# Altium PCB 智能车驱动板DRV8701E元件PCB.PcbDoc
Units mil, origin at the board's own origin, x right, y up, seen from the top; angles counter-clockwise.
Board outline 3320.29 x 1280 mil, 2 copper layers (Top Layer, Bottom Layer); 45 components, 38 nets, 213 pads, 36 vias.
Unrouted connection lines stored in the file: 33.
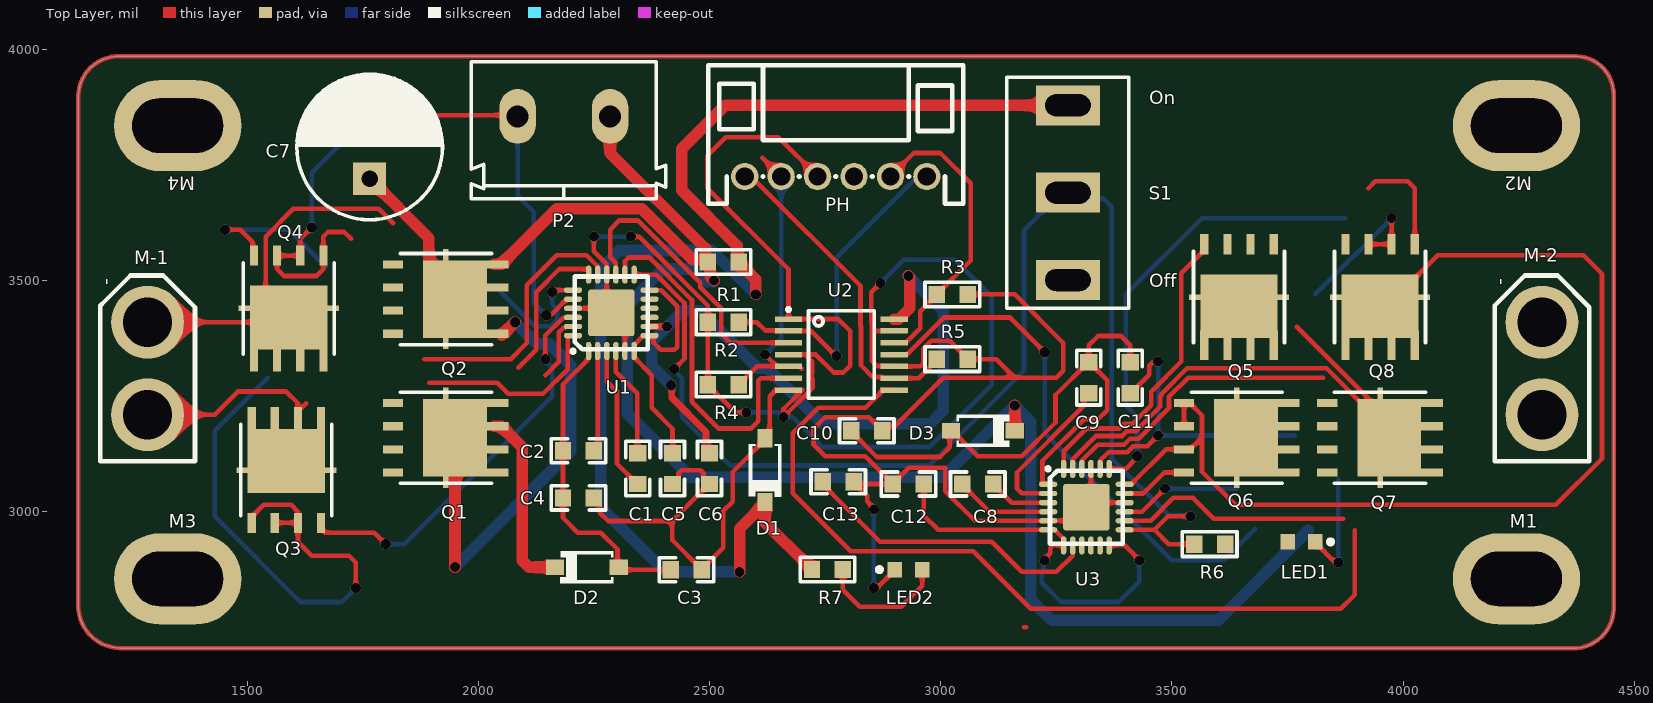
[diagram p0: Top Layer view]
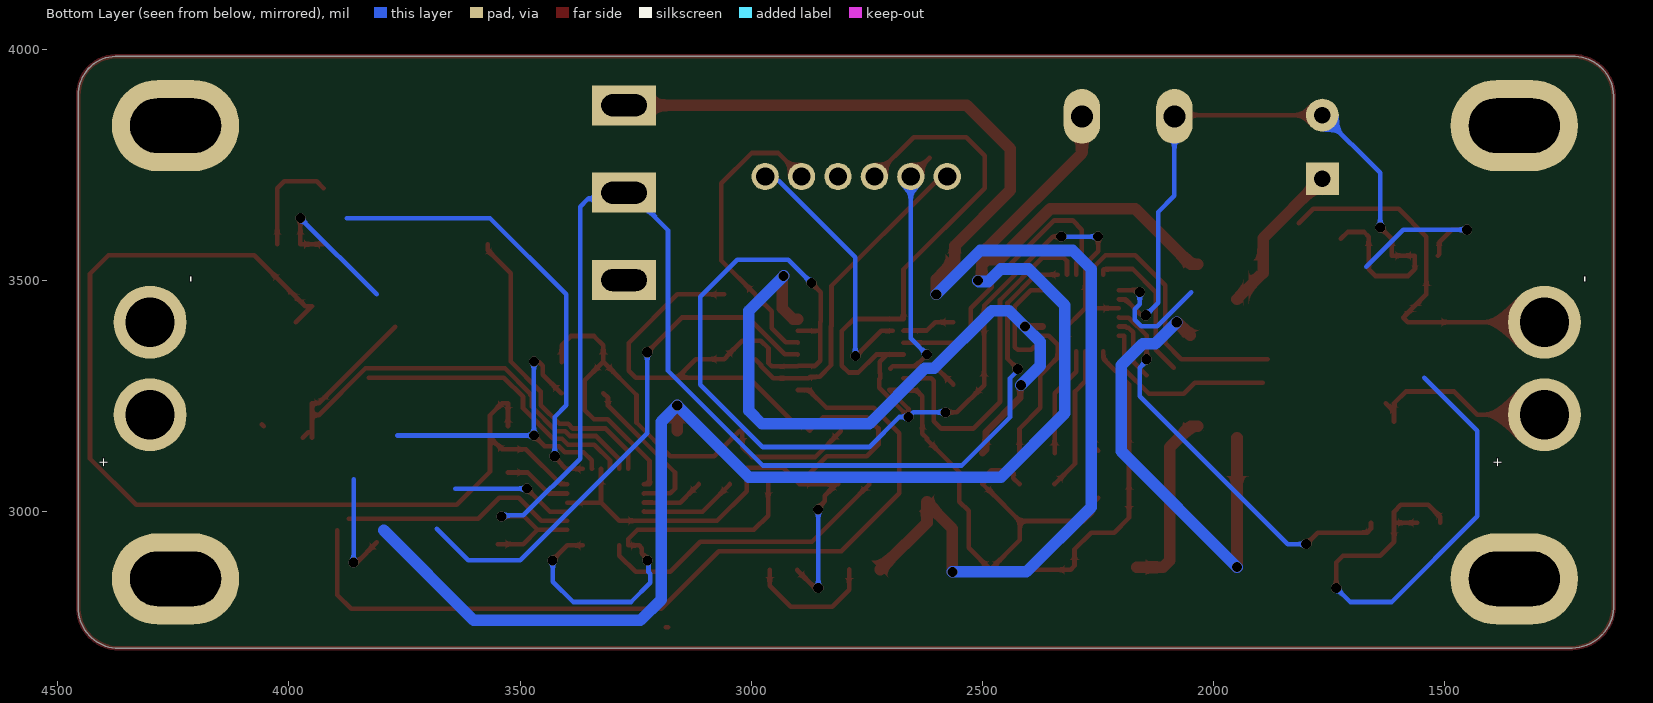
[diagram p1: Bottom Layer view, seen from below]
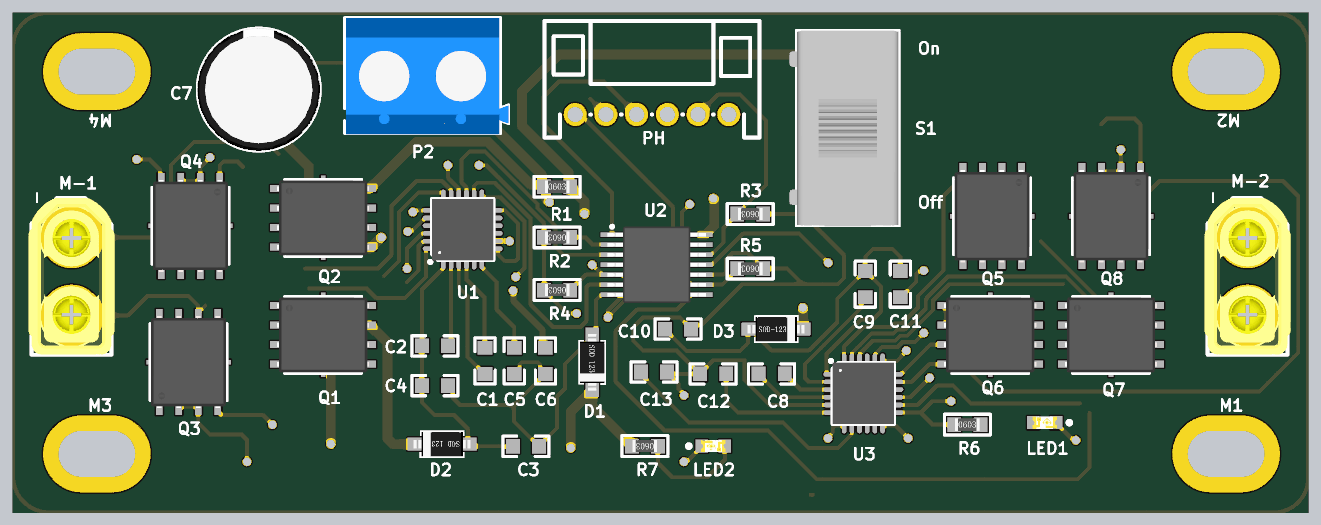
[diagram p2: 3D render of the assembled board from above, using the file's embedded part models]

## Layer stack, top to bottom
Top Solder: solder mask 0.4, Solder Resist, Dk 3.5
Top Layer: signal copper 1.4
Dielectric 1: dielectric 12.6, FR-4, Dk 4.8
Bottom Layer: signal copper 1.4
Bottom Solder: solder mask 0.4, Solder Resist, Dk 3.5

## Board outline
1225,2705 cw(c1227.5,2797.5) 1135,2800 1135,3900 cw(c1222.5,3897.5) 1225,3985 4375,3985 cw(c4372.5,3902.5) 4455,3900 4455,2800 cw(c4367.5,2792.5) 4375,2705

## Design rules (kind name [scope] priority, off if disabled: settings)
BoardOutlineClearance [All] p1: gap=10 ignorepadtopadclearanceinfootprint=FALSE except(0: Arc-SplitContinuation Track-SplitContinuation SMDPad-SplitContinuation THPad-SplitContinuation Via-SplitContinuation Fill-SplitContinuation Poly-SplitContinuation Region-SplitContinuation Text-SplitContinuation; 30: Poly-OutlineEdge Poly-CavityEdge Poly-CutoutEdge Poly-SplitBarrior)
Clearance [All] p1: gap=6 ignorepadtopadclearanceinfootprint=FALSE except(10: Arc-Fill Arc-Poly Arc-Region Track-Fill Track-Poly Track-Region SMDPad-Fill SMDPad-Poly SMDPad-Region THPad-Fill THPad-Poly THPad-Region Fill-Fill Fill-Poly Fill-Region Poly-Poly Poly-Region Region-Region)
PolygonConnect [All] p1: connectstyle=Relief reliefconductorwidth=10 reliefentries=4 polygonreliefangle="90 Angle" airgapwidth=10
RoutingVias [All] p1: holewidth=12 width=22 viastyle="Through Hole" minholewidth=12 minwidth=22 maxholewidth=12 maxwidth=22
SolderMaskExpansion [All] p1: expansion=4 istentingtop=FALSE
Width GND [All] p1: maxlimit=50 minlimit=10 preferedwidth=10
Width PWN [InNetClass('PWN')] p2: maxlimit=50 minlimit=15 preferedwidth=25
Width [All] p3: maxlimit=10 minlimit=6 preferedwidth=10
30 further rules are at their usual default settings.

## Classes and differential pairs
net class POWER: 3V3 DVDD GND VM
net class PWN: 3V3 DVDD VM

## Components (designator, comment, footprint, x,y, rotation, side; value= is the part's Value field where it differs from the comment)
C1 "100nF ±10% 50V" CAPC1608[0603]S-N 2345,3093.46 r270 top value=100nF
C2 "100nF ±10% 50V" CAPC1608[0603]S-N 2216.57,3131.79 r180 top value=100nF
C3 "100nF ±10% 50V" CAPC1608[0603]S-N 2450,2874.5 r0 top value=100nF
C4 "100nF ±10% 50V" CAPC1608[0603]S-N 2216.57,3030 r0 top value=100nF
C5 "100nF ±10% 50V" CAPC1608[0603]S-N 2420,3093.46 r90 top value=100nF
C6 "100nF ±10% 50V" CAPC1608[0603]S-N 2500,3093.46 r90 top value=100nF
C7 "220uF 25V" CAPPR3.5-8X11.5 1765,3788.9 r90 top value=220uF
C8 "100nF ±10% 50V" CAPC1608[0603]S-N 3080,3060 r0 top value=100nF
C9 "100nF ±10% 50V" CAPC1608[0603]S-N 3320,3290 r90 top value=100nF
C10 "100nF ±10% 50V" CAPC1608[0603]S-N 2840,3175 r0 top value=100nF
C11 "100nF ±10% 50V" CAPC1608[0603]S-N 3410,3290 r270 top value=100nF
C12 "100nF ±10% 50V" CAPC1608[0603]S-N 2930,3060 r0 top value=100nF
C13 "100nF ±10% 50V" CAPC1608[0603]S-N 2778.46,3065 r180 top value=100nF
D1 "BZT52C3V3" SOD-123-L 2620,3090 r270 top
D2 "1N5819" SOD-123-L 2235,2880 r180 top
D3 "1N5819" SOD-123-L 3091.1,3175 r0 top
LED1 "Blue" LEDC1608(0603) 3780,2935 r180 top
LED2 "" LEDC1608(0603) 2930.47,2875 r0 top
M1 "MountHole" M3-MountSlot#1 4227.83,2832.2 r0 top
M2 "MountHole" M3-MountSlot#1 4227.83,3812.2 r0 top
M3 "MountHole" M3-MountSlot#1 1332.83,2832.2 r0 top
M4 "MountHole" M3-MountSlot#2 1332.83,3812.2 r0 top
M-1 "xt30-M1" XT30-M 1285,3310 r90 top
M-2 "xt30-M2" XT30-M 4300,3310 r90 top
P2 "KF/WJ/DG 30x connecter" "KF/WJ/DG 301-2p-5.0mm" 2185,3855 r180 top
PH "PH  X6" "PH  X6" 2773.11,3725 r0 top
Q1 "TPH1R403NL" DFN5x6 1930,3160 r270 top
Q2 "TPH1R403NL" DFN5x6 1930,3460 r270 top
Q3 "TPH1R403NL" DFN5x6 1585,3090.31 r0 top
Q4 "TPH1R403NL" DFN5x6 1590,3439.69 r180 top
Q5 "TPH1R403NL" DFN5x6 3645,3464.33 r180 top
Q6 "TPH1R403NL" DFN5x6 3640.31,3160 r270 top
Q7 "TPH1R403NL" DFN5x6 3950,3160 r270 top
Q8 "TPH1R403NL" DFN5x6 3950,3464.33 r180 top
R1 "2.2K ±1%" RESC1608[0603]S-N 2530,3540 r0 top value=2.2K
R2 "10K ±1%" RESC1608[0603]S-N 2530,3410 r180 top value=10K
R3 "10K ±1%" RESC1608[0603]S-N 3025,3470 r180 top value=10K
R4 "10K ±1%" RESC1608[0603]S-N 2530,3275 r180 top value=10K
R5 "10K ±1%" RESC1608[0603]S-N 3025,3330 r180 top value=10K
R6 "330R ±1%" RESC1608[0603]S-N 3581.54,2930 r0 top value=330R
R7 "1K ±1%" RESC1608[0603]S-N 2755,2875.08 r180 top value=1K
S1 "SW-SPDT" SS12D10 3275,3690 r90 top
U1 "DRV8701E" QFN24-4x4 2287.68,3430.16 r90 top
U2 "SN74HC125PWR" TSSOP-14 2785,3340 r0 top
U3 "DRV8701E" QFN24-4x4 3315,3010 r0 top

## Footprints (in the part's own frame and the unit in brackets; to place one, negate y for a bottom-side part, rotate by r counter-clockwise, add the part's x,y. Pads: shape width x height; smd on the part's side, far side on the other; paste and mask are expansions set on the pad)
CAPC1608[0603]S-N [mm]
  rect 0.9x0.95 smd: 1(-0.85,0) 2(0.85,0)
  silkscreen extent -1.5,-0.66 1.5,0.66, body extent -0.8,-0.41 0.8,0.41, height 0.79
CAPPR3.5-8X11.5 [mm]
  rect 1.8x1.8 hole 0.9: 1(-1.75,0)
  round 1.8 hole 0.9: 2(1.75,0)
  silkscreen extent -4,-4.01 4,4, body extent -4,-3.98 4,3.98, height 11.5
DFN5x6 [mm]
  rect 0.45x1.6 smd: 1(-1.905,2.65) 1(-0.635,2.65) 1(0.635,2.65) 1(1.905,2.65)
  rect 5.5x0.3 smd: 1(0,0)
  rect 4.25x3.5 smd: 1(0,0.5)
  rect 0.45x1.1 smd: 2(1.905,-2.9) 3(-1.905,-2.9) 3(-0.635,-2.9) 3(0.635,-2.9)
  silkscreen extent -2.5,-2.5 2.5,2.5, body extent -2.45,-3 2.45,3, height 1
"KF/WJ/DG 301-2p-5.0mm" [mm]
  oval 2x3 hole 1.2: 1(2.54,0) 2(-2.54,0)
  silkscreen extent -5.6,-3 5.08,4.52, body extent -5.6,-3 5,4.6, height 10
LEDC1608(0603) [mm]
  rect 0.8x0.85 smd: A(0.75,0) C(-0.75,0)
  silkscreen extent -1.73,-0.12 -1.48,0.12, body extent -0.8,-0.4 0.8,0.4, height 0.64
M3-MountSlot#1 [mm]
  oval 7x5 hole 3 slot 5 at 0 deg: 1(0.436,0.579)
M3-MountSlot#2 [mm]
  oval 7x5 hole 3 slot 5 at 0 deg: ""(0.436,0.579)
"PH  X6" [mm]
  round 1.5 hole 1: 1(5,0) 2(3,0) 3(1,0) 4(-1,0) 5(-3,0) 6(-5,0)
  silkscreen extent -7,-1.5 7,6.1
QFN24-4x4 [mm]
  rrect10% 2.55x2.55 smd: 0(0,0)
  oval 1x0.3 smd: 1(-2.1,1.25) 2(-2.1,0.75) 3(-2.1,0.25) 4(-2.1,-0.25) 5(-2.1,-0.75) 6(-2.1,-1.25) 13(2.1,-1.25) 14(2.1,-0.75) 15(2.1,-0.25) 16(2.1,0.25) 17(2.1,0.75) 18(2.1,1.25)
  oval 0.3x1 smd: 7(-1.25,-2.1) 8(-0.75,-2.1) 9(-0.25,-2.1) 10(0.25,-2.1) 11(0.75,-2.1) 12(1.25,-2.1) 19(1.25,2.1) 20(0.75,2.1) 21(0.25,2.1) 22(-0.25,2.1) 23(-0.75,2.1) 24(-1.25,2.1)
  silkscreen extent -2.21,-2 2,2.21, body extent -2,-2 2,2, height 0.9
RESC1608[0603]S-N [mm]
  rect 0.9x0.95 smd: 1(-0.85,0) 2(0.85,0)
  silkscreen extent -1.5,-0.67 1.5,0.67, body extent -0.8,-0.4 0.8,0.4, height 0.45
SOD-123-L [mm]
  rect 1x0.85 smd: A(-1.75,0) K(1.75,0)
  silkscreen extent -1.45,-0.9 1.47,0.9, body extent -1.85,-0.8 1.85,0.8, height 1.2
SS12D10 [mm]
  rect 2.2x3.5 hole 1.2 slot 2.5 at 90 deg mask+0.07: 1(-4.8,0) 2(0,0) 3(4.8,0)
  silkscreen extent -6.35,-3.35 6.35,3.35, body extent -6.4,-3.3 6.35,3.8, height 12.5
TSSOP-14 [mm]
  rect 1.5x0.3 smd mask+0.07: 1(-2.9,1.95) 2(-2.9,1.3) 3(-2.9,0.65) 4(-2.9,0) 5(-2.9,-0.65) 6(-2.9,-1.3) 7(-2.9,-1.95) 8(2.9,-1.95) 9(2.9,-1.3) 10(2.9,-0.65) 11(2.9,0) 12(2.9,0.65) 13(2.9,1.3) 14(2.9,1.95)
  silkscreen extent -2.99,-2.4 1.8,2.57, body extent -3.2,-2.5 3.2,2.5, height 1.13
XT30-M [mm]
  round 4 hole 2.7: 1(-2.54,0) 2(2.54,0)
  silkscreen extent -5.1,-2.6 5.11,2.6, body extent -5.1,-2.8 5.1,2.8, height 10.66

## Part data
C1 C2 C3 C4 C5 C6 C8 C9 C10 C11 C12 C13: library part Cap-Chip_1, "贴片电容", Tolerance=±10%, Voltage=50V, Price(RMB)=0.000, Published=8-Jun-2000, Publisher="Altium Limited", Revision="July-2002: Re-released for DXP Platform."
C7: library part Cap-Elect, "Polarized Capacitor (Radial)", Voltage=25V, Price(RMB)=0.000, Published=8-Jun-2000, Publisher="Altium Limited", Revision="July-2002: Re-released for DXP Platform."
D1: library part "Diode Zen", "3.3V稳压二极管 SOD-123", Price(RMB)=0.000, Published=8-Jun-2000, Publisher="Altium Limited", Revision="July-2002: Re-released for DXP Platform."
D2 D3: library part "Diode Schottky", "肖特基二极管 Diode", Imax=500mA, PartNumber=1N5819, Price(RMB)=0.000, Published=8-Jun-2000, Publisher="Altium Limited", Revision="July-2002: Re-released for DXP Platform."
LED1: library part "LED Chip Blue", "Typical Chip LED", Color=Blue, Price(RMB)=0.00, Published=8-Jun-2000, Publisher="Altium Limited", Revision="July-2002: Re-released for DXP Platform."
LED2: library part "LED Chip Red", "Typical Chip LED", Price(RMB)=0.00, Published=8-Jun-2000, Publisher="Altium Limited", Revision="July-2002: Re-released for DXP Platform."
M1 M2 M3 M4: "固定孔"
M-1 M-2: library part xt30-M, "电机驱动"
P2: library part "KF/WJ/DG 30x", "接线端子 2Pin"
PH: "6脚PH"
Q1 Q2 Q3 Q4 Q5 Q6 Q7 Q8: "东芝 N沟 MOS"
R1: library part Res-Chip, "贴片电阻", Tolerance=±1%, Price(RMB)=0.000, Published=8-Jun-2000, Publisher="Altium Limited", Revision="July-2002: Re-released for DXP Platform."
R2 R3 R4 R5: library part Res-Chip_1, "贴片电阻", Tolerance=±1%, Price(RMB)=0.000, Published=8-Jun-2000, Publisher="Altium Limited", Revision="July-2002: Re-released for DXP Platform."
R6: library part Res-Chip_3, "贴片电阻", Tolerance=±1%, Price(RMB)=0.000, Published=8-Jun-2000, Publisher="Altium Limited", Revision="July-2002: Re-released for DXP Platform."
R7: library part Res-Chip_2, "贴片电阻", Tolerance=±1%, Price(RMB)=0.000, Published=8-Jun-2000, Publisher="Altium Limited", Revision="July-2002: Re-released for DXP Platform."
S1: "单刀双掷开关 3脚船型、钮子、拨动开关 SPDT Subminiature Toggle Switch", Price(RMB)=0.000, Published=24-Mar-1999, Publisher="Altium Limited"
U1 U3: "DRV8701E Ti全桥驱动芯片"
U2: "三态输出的四路缓冲器 TSSOP-20"

## Via types
v1: diameter 22, hole 22, Top Layer to Bottom Layer, 36 vias

## Nets (pads, with @x,y where several pads share a name; then routed paths per layer and width w, separated by ;. In a path a pad name is that pad's centre, name@x,y a point inside that pad or via, vN(x,y) a via of type N, cw(c..) or ccw(c..) an arc to the next point about the centre after c; other vN are vias at no path point)
3V3: D1.K R1.2 R7.2 S1.3 | length 2878.7
  Top Layer w25: v1(2565,2870) 2565,2963.15 D1.K@2620,3018.15 ; v1(2600,3470) 2600,3502.48 2563.46,3539.02 R1.2 2559.51,3543.96 2559.51,3575.49 2440,3695 2440,3785 2533.98,3878.98 S1.3 ; D1.K D1.K@2620,3018.15 ; R7.2 2721.54,2876.06 2668.65,2928.95 2667.67,2928.95 2620,2976.61 D1.K@2620,3018.15
  Bottom Layer w25: v1(2565,2870) 2405,2870 2265,3010 2265,3525 2305,3565 2505,3565 v1(2600,3470)
DVDD: C6.2 U1.8 U2.14 | length 1538.2
  Top Layer w15: U1.8 2370.49,3400.49 2407.86,3400.49 v1(2408,3400.35) ; v1(2417,3273.68) 2418.34,3272.34 2418.34,3246.66 2492.42,3172.58 2492.42,3134.51 C6.2
  Top Layer w25: U2.14 2909.61,3416.77 2932.54,3439.7 2932.54,3507.46 v1(2930,3510)
  Bottom Layer w25: v1(2417,3273.68) 2375,3315.68 2375,3367.35 v1(2408,3400.35) 2442.65,3435 2480,3435 2604.66,3310.34 2624.66,3310.34 2745,3190 2976.77,3190 3005,3218.23 3005,3435 v1(2930,3510)
GND: C3.2 C4.2 C5.1 C6.1 C7.2 C10.2 C11.2 C12.1 C13.1 D1.A LED1.C LED2.C P2.1 PH.3 PH.4 Q3.3 Q4.3 Q7.3 Q8.3 R2.2 R3.1 R4.2 R5.1 U1.0 U1.5 U1.16 U1.20 U1.21 U2.1 U2.4 U2.7 U2.10 U2.13 U3.0 U3.5 U3.16 U3.20 U3.21 | length 11577.2
  Top Layer w10: Q3.3@1510,2976.14 1510,2988.94 1536.06,3015 1595.36,3015 1610,3000.36 Q3.3@1610,2976.14 ; Q3.3@1560,2976.14 Q3.3@1610,2976.14 ; v1(1640,3615) 1615,3590 1615,3553.86 1565,3553.86 1565,3524.64 1579.64,3510 1650.36,3510 1665,3524.64 1665,3595 1675,3605 1710.36,3605 1725,3590.36 ; v1(1735,2835) 1735,2890.36 1720.36,2905 1640,2905 1610,2935 Q3.3@1610,2976.14 ; C7.2 2082.2,3857.8 P2.1 ; v1(2147,3425) 2149.3,3427.3 2158.83,3427.3 2190.63,3459.09 2204.41,3459.09 U1.20 ; U1.21 U1.0@2277.83,3440 ; v1(2250,3595) 2250,3563.1 2277.49,3535.61 2277.49,3513.18 U1.16 U1.0@2277.83,3440 ; C4.2 2262.76,3017.28 2262.76,2998.1 2280.86,2980 2419.02,2980 ; U1.5 2317.2,3400.63 U1.0 U1.0@2277.83,3440 ; v1(2329.83,3595) 2347.63,3595 2496.54,3446.09 R2.2 R4.2 2496.54,3274.02 2555.55,3215 v1(2580,3215) ; C5.1 2420.77,3060 2433.49,3072.72 2433.49,3084.14 2439.35,3090 2480.65,3090 2486.51,3084.14 2486.51,3072.72 2499.23,3060 C6.1 C6.1@2483.46,3043.46 ; C6.1@2482.97,3043.96 2419.02,2980 ; U2.4 2730,3340 2768.79,3301.21 2789.5,3301.21 2804.15,3315.85 2804.15,3390.85 2778.23,3416.77 U2.1 2670.83,3524.17 2495,3700 2495,3770 2535,3810 2648.74,3810 PH.4 ; 2708.02,3338.81 2722.5,3324.33 2722.5,3300.12 2721.44,3299.06 2721.44,3288.56 2722.85,3287.15 2722.85,3267.85 v1(2660,3205) 2660,3222.29 2701.84,3264.13 2671.73,3264.13 U2.7 2669.92,3262.32 2642.32,3262.32 2630,3250 2630,3168.9 D1.A 2620,3155.94 2550,3085.94 2550,3022.07 2530,3002.07 2530,2922.02 2483.46,2875.49 C3.2 2419.02,2938.95 2419.02,2980 ; C13.1@2811.54,3060 C12.1 C12.1@2896.54,3060.98 ; C13.1 2811.93,3064.02 2841.25,3034.7 2841.25,3022.39 2855.39,3008.25 v1(2855.39,3005) ; v1(2855,2835) 2861.93,2835 2900.94,2874.02 LED2.C ; 2856.18,3391.18 U2.13 ; v1(2870,3495) 2850,3475 2850,3411.47 2851.15,3410.32 2851.15,3326.43 2861.98,3315.59 2897.99,3315.59 U2.10 2955.81,3314.41 2962.82,3321.42 2962.82,3353.26 2979.56,3370 3019.45,3370 3053.25,3336.2 3053.25,3335.22 R5.1 3120,3330 3160,3290 ; C10.2 2883.79,3185.32 2900.32,3185.32 3005,3290 3160,3290 ; C10.2@2873.46,3175.98 2844.75,3204.7 2749.7,3204.7 2725,3180 2725,3145 2750,3120 2836.54,3120 2882.83,3073.7 2883.82,3073.7 C12.1@2896.54,3060.98 ; R3.1 3160,3470 3265,3365 3265,3305 3250,3290 3160,3290 ; U3.21 U3.0@3324.84,3019.84 ; U3.20 3344.87,3093.02 3344.87,3111.03 3362.85,3129 3402.89,3129 3415.89,3142 3447,3142 v1(3470,3165) ; U3.16 U3.0@3324.84,3019.84 ; C11.2 3410.98,3256.54 3450.57,3296.12 3450.57,3315.94 3457.33,3322.7 3467.7,3322.7 v1(3470,3325) ; LED1.C@3809.53,2934.02 3853.54,2890 v1(3860,2890) ; Q8.3@3925,3578.5 3975,3578.5 v1(3975,3635) ; 3925,3700 3940,3715 4010,3715 4025,3700 Q8.3@4025,3578.5 ; C12.1@2896.54,3060.98 2930.55,3095 3010,3095 3010,3044.56 3074.09,2980.47 U3.5 3285.47,2980.47 U3.0 U3.0@3324.84,3019.84
  Bottom Layer w10: 1545,3290 1430,3175 1430,2990 1615,2805 1705,2805 v1(1735,2835) ; v1(1640,3615) 1640,3732.8 C7.2 ; P2.1 2085,3683.22 2120,3648.22 2120,3452 v1(2147,3425) ; v1(2250,3595) v1(2329.83,3595) ; v1(2580,3215) 2650,3215 v1(2660,3205) 2680,3205 2745,3140 2975,3140 3110,3275 3110,3465 3030,3545 2920,3545 v1(2870,3495) ; v1(2855,2835) v1@2855,3000 ; v1(3470,3325) v1(3470,3165) 3765,3165 ; 3810,3470 v1(3975,3635) ; v1(3860,2890) 3860,3070
"L  A": M-1.1 Q1.3 Q3.1 U1.23 | length 562.1
  Top Layer w10: M-1.1 1430,3210 1480,3260 1585,3260 1609.72,3235.28 1609.72,3217.57 Q3.1@1610,3217.28 ; Q3.1@1610,3194.65 Q3.1@1610,3217.28 ; 1627.72,3235 Q3.1@1610,3217.28 ; 2145.27,3295.27 2174.31,3324.31 2174.31,3387.95 2184.22,3397.85 2187.95,3397.85 2190.73,3400.63 U1.23
"L  B": M-1.2 Q2.3 Q4.1 U1.18 | length 1143.6
  Top Layer w10: M-1.2 1580,3410 1590,3420 1570.31,3439.69 1540,3470 1540,3595 1600,3655 1785,3655 1815.83,3624.17 ; 2086.27,3311.27 2125,3350 2125,3475 2175,3525 2226.3,3525 2226.79,3524.51 2237.63,3524.51 2238.46,3523.67 U1.18
L_EN: U1.14 U2.6 | length 764.4
  Top Layer w10: U1.14 2317.2,3542.2 2325,3550 2370,3550 2462,3458 2462,3238 2520,3180 2589.13,3180 2605,3195.87 2605,3282.96 2610.86,3288.82 U2.6
L_EN_IN: PH.5 R4.1 U2.5 | length 654.2
  Top Layer w10: R4.1 2563.46,3275.98 2576.18,3288.7 2577.17,3288.7 2602.87,3314.41 U2.5@2647.2,3314.41 ; 2614.47,3765.53 PH.5 ; v1@2620,3345 v1(2620,3339.84) 2637.37,3322.47 2639.15,3322.47 U2.5@2647.2,3314.41 ; U2.5@2699,3309.86 2694.45,3314.41 U2.5 U2.5@2647.2,3314.41
  Bottom Layer w10: v1(2620,3339.84) 2655,3374.84 PH.5
L_PH: U1.15 U2.3 | length 643.6
  Top Layer w10: U1.15 2297.17,3513.18 2297.17,3538.56 2285,3550.73 2285,3610 2305,3630 2345,3630 2480,3495 2480,3485.25 2525.25,3440 2525.25,3385.57 2545.23,3365.59 U2.3
L_PH_IN: PH.1 R2.1 U2.2 | length 698.3
  Top Layer w10: R2.1 2602.28,3410 2620.2,3392.09 2669.92,3392.09 U2.2 ; U2.2@2694.45,3391.18 2718.82,3391.18 2772.93,3337.07 v1(2774.65,3337.07)
  Bottom Layer w10: v1(2774.65,3337.07) 2775,3337.43 2775,3550 2940.61,3715.61 2960.57,3715.61 PH.1
NetC1_1: C1.1 U1.4 | length 239.8
  Top Layer w10: U1.4 2297.52,3302.48 2344.02,3255.98 C1.1@2344.02,3126.93
NetC1_2: C1.2 U1.3 | length 315.9
  Top Layer w10: U1.3 2277.83,3282.17 2300,3260 2300,3104.02 2344.02,3060 C1.2
NetC2_1: C2.1 U1.2 | length 219.1
  Top Layer w10: C2.1 2258.15,3139.9 U1.2
NetC2_2: C2.2 C3.1 C4.1 D2.A U1.1 | length 684.6
  Top Layer w10: U1.1 2238.46,3333.21 2237.56,3332.31 2237.56,3329.93 2183.11,3275.48 C2.2 C4.1 2183.11,2986.89 2215,2955 2265,2955 2300.94,2919.06 2300.94,2882.95 2309.39,2874.5 C3.1
NetC5_2: C5.2 U1.6 U1.7 U1.12 | length 556.3
  Top Layer w10: U1.12 2370.7,3479.02 2395.72,3479.02 2430,3444.75 2430,3355.86 2424.14,3350 2395,3350 2378.88,3366.12 2378.88,3380.11 2378.04,3380.94 2356.57,3380.94 2336.89,3361.26 U1.6 2336.89,3333.7 2375,3295.59 2375,3224.78 2420,3179.78 C5.2
NetC8_1: C8.1 U3.4 | length 210.9
  Top Layer w10: C8.1 3046.54,3059.02 3105.39,3000.16 3231.63,3000.16 U3.4@3231.98,3000.5
NetC8_2: C8.2 U3.3 | length 154.6
  Top Layer w10: C8.2 3113.46,3059.02 3126.18,3046.3 3127.17,3046.3 3153.62,3019.84 U3.3 3231.98,3020.19 U3.3@3213.97,3020.19
NetC9_1: C9.1 U3.2 | length 342.4
  Top Layer w10: U3.2 3231.98,3039.87 3175.13,3039.87 3165,3050 3165,3085 3309.68,3229.68 3309.68,3246.21 C9.1
NetC9_2: C9.2 C10.1 C11.1 D3.A U3.1 | length 1270.4
  Top Layer w10: C10.1 2806.54,3174.02 2862.05,3118.5 2998.5,3118.5 3019.25,3139.25 3019.25,3172.05 D3.A 3025.16,3175 3080.16,3120 3175,3120 3248.15,3193.15 3248.15,3252.6 3319.02,3323.46 C9.2 ; U3.1 3220.84,3059.21 3220,3060.05 3220,3110 3310,3200 3340,3200 3360,3220 3360,3284.45 3320.98,3323.46 C9.2 ; C11.1 3410,3360 3390,3380 3340,3380 3320,3360 C9.2
NetC12_2: C12.2 U3.6 U3.7 U3.12 | length 891.1
  Top Layer w10: C12.2 2963.46,2991.54 2994.21,2960.79 U3.6 3246.1,2960.79 3265.79,2941.1 U3.7 3242.32,2927.32 3236.46,2921.46 3236.46,2910.21 3224.5,2898.25 v1(3224.5,2895) ; U3.12 3397.68,2927.32 v1(3430,2895)
  Bottom Layer w10: v1(3224.5,2895) 3222.2,2892.7 3222.2,2869.46 3218.5,2865.75 3218.5,2846.5 3260,2805 3385,2805 3429.12,2849.12 3429.12,2894.12 v1(3430,2895)
NetC13_2: C13.2 U3.8 | length 656.6
  Top Layer w10: C13.2@2744.61,3060 2744.61,3059.02 2868.62,2935 3110,2935 3175,2870 3249.79,2870 3285.13,2905.34 3285.13,2926.98 U3.8
NetLED1_A: LED1.A R6.2
NetLED2_A: LED2.A R7.1 | length 283.9
  Top Layer w10: R7.1 2788.46,2831.54 2825,2795 2915,2795 2960,2840 LED2.A
NetQ1_2: Q1.2 U1.24 | length 415
  Top Layer w10: 1894.27,3279.27 2040.73,3279.27 2065,3255 2140,3255 2193.33,3308.33 2193.33,3380.11 2194.16,3380.94 U1.24
NetQ2_2: Q2.2 U1.17 | length 569
  Top Layer w10: 1883.62,3330 2070,3330 2105,3365 2105,3490 2170,3555 2233.99,3555 2257.8,3531.18 2257.8,3513.18 U1.17
NetQ3_2: Q3.2 U1.22 | length 872.8
  Top Layer w10: Q3.2 1660,2963.35 1668.35,2955 1775,2955 v1(1800,2930) ; v1(2145,3330) 2145,3381.26 2183.71,3419.97 2204.65,3419.97 U1.22
  Bottom Layer w10: v1(1800,2930) 1840,2930 2160,3250 2160,3311.75 2145,3326.75 v1(2145,3330)
NetQ4_2: Q4.2 U1.19 | length 622
  Top Layer w10: v1(1452.01,3610) 1485,3610 1512.21,3582.79 1512.21,3556.65 Q4.2 ; v1(2160,3475) 2163.25,3475 2167.62,3479.37 U1.19
  Bottom Layer w10: v1(1452.01,3610) 1590,3610 1670,3530 ; 2048.23,3475 2121.73,3401.5 2156.73,3401.5 2170.5,3415.27 2170.5,3438.26 2160,3448.76 v1(2160,3475)
NetQ5_2: Q5.2 U3.24 | length 664.4
  Top Layer w10: U3.24 3265.79,3130.79 3315,3180 3386.01,3180 3396.01,3190 3414.75,3190 3455,3230.25 3455,3260 3520,3325 3520,3515.71 3570,3565.71 Q5.2
NetQ6_2: Q6.2 U3.17 | length 147.3
  Top Layer w10: U3.17 3437.98,3039.53 3483.45,3085 Q6.2
NetQ7_2: Q7.2 U3.22 | length 628.6
  Top Layer w10: U3.22 3305.5,3093.02 3305.5,3111.03 3339.48,3145 3396.26,3145 3409.26,3158 3428,3158 3493.49,3223.49 3493.49,3248.41 3535.07,3290 3826.89,3290
NetQ8_2: Q8.2 U3.19 | length 976.8
  Top Layer w10: U3.19 3398.16,3092.68 3400.87,3092.68 3406.73,3098.54 v1(3425,3120)
  Bottom Layer w10: v1(3425,3120) 3425,3205 3400,3230 3400,3470 3565,3635 3875,3635
nSLEEP: R6.1 S1.2 U1.13 U3.13 | length 2825.2
  Top Layer w10: U1.13 2384.54,3512.83 2446,3451.37 2446,3331 v1(2423.7,3308.7) ; U3.13 3462.26,2960.79 ; v1(3540,2990) 3491.47,2990 3462.26,2960.79 ; R6.1 3493.05,2930 3462.26,2960.79
  Bottom Layer w10: v1(2423.7,3308.7) 2423.7,3305.53 2440.5,3288.73 2440.5,3204.5 2545,3100 2975,3100 3180,3305 3180,3609.14 3260.86,3690 S1.2 3288.04,3676.96 3353.04,3676.96 3370,3660 3370,3115 3492.7,2992.3 3537.7,2992.3 v1(3540,2990)
"R  A": M-2.1 Q5.3 Q7.1 U3.23 | length 1206.2
  Top Layer w10: U3.23 3285.82,3093.02 3285.82,3113.97 3335.85,3164 3392.63,3164 3402.63,3174 3421.37,3174 3475,3227.63 3475,3250 3477.49,3252.49 3477.49,3255.04 3532.45,3310 3834.14,3310 3934.95,3209.19 3949.09,3209.19 Q7.1@3950,3208.28 ; 3770,3400 3934.95,3235.05 3949.09,3235.05 3950,3234.14 Q7.1@3950,3208.28 ; Q7.1@3950,3160 3950,3164.69 Q7.1@3950,3171.59 ; Q7.1@3969.69,3160 3958.1,3171.59 Q7.1@3950,3171.59 ; Q7.1@4054.33,3185 Q7.1@4058.19,3188.86 ; M-2.1@4278.86,3188.86 M-2.1 ; Q7.1@3950,3171.59 Q7.1@3950,3208.28
"R  B": M-2.2 Q6.3 Q8.1 U3.18 | length 2358.7
  Top Layer w10: U3.18 3411.46,3059.21 3487.24,3135 3526.14,3135 3538.94,3135 3565,3161.06 ; Q6.3@3526.14,3185 3526.14,3235 3538.94,3235 3565,3208.94 3565,3161.06 ; Q8.1@3984.65,3410 3950,3444.65 3964.76,3444.65 4075.12,3555 4390,3555 4430,3515 4430,3115 4330,3015 3636.88,3015 3565,3086.88 3565,3161.06
R_EN: U2.8 U3.14 | length 2370.9
  Top Layer w10: U2.8 2875.55,3263.23 2837.32,3225 2735,3225 2680,3170 2680,3040 2805,2915 3070,2915 3195,2790 3865,2790 3895,2820 3895,2960 ; U3.14 3453.71,2980.47 3503.24,3030 3545,3030 3590.43,2984.57 3870.43,2984.57
R_EN_IN: PH.6 R5.2 U2.9 | length 714.4
  Top Layer w10: PH.6 2589.53,3725 2604.15,3710.38 2604.62,3710.38 2826.5,3488.5 2826.5,3401.73 2827.65,3400.59 2827.65,3393.47 2827.65,3316.7 2852.25,3292.09 2872.28,3292.09 2875.55,3288.82 U2.9 2952.84,3288.82 2978.82,3314.8 2978.82,3317.28 R5.2
R_PH: U2.11 U3.15 | length 1425.2
  Top Layer w10: U2.11 2900.08,3340.91 2927.84,3340.91 3006.93,3420 3150,3420 v1(3225,3345) ; U3.15 3435.16,3000.16 v1(3485,3050)
  Bottom Layer w10: v1(3225,3345) 3225,3170 3500,2895 3611.77,2895 3680,2963.23 ; v1(3485,3050) 3640,3050
R_PH_IN: PH.2 R3.2 U2.12 | length 650.1
  Top Layer w10: PH.2 2942.08,3775.86 2999.14,3775.86 3065,3710 3065,3543.46 R3.2 2991.54,3469.02 2956.04,3433.52 2956.04,3397.06 2925.48,3366.5 2900.08,3366.5 U2.12
VM: C7.1 D2.K D3.K P2.2 Q1.1 Q2.1 Q5.1 Q6.1 R1.1 | length 5374.1
  Top Layer w25: C7.1 1893.29,3591.71 1893.29,3516.4 Q2.1@1949.69,3460 ; Q1.1@1949.69,3160 v1(1949.69,2880.31) v1@1950,2880 ; Q1.1@2034.33,3185 2049.69,3185 2095,3139.68 2095,2894.64 2109.64,2880 D2.K ; Q2.1@2034.33,3535 2049.69,3535 2169.69,3655 2353.23,3655 2463.44,3544.79 R1.1@2491.74,3544.79 ; Q2.1@2050.42,3381.36 2079.06,3410 v1(2080,3410) ; P2.2 2285,3775.61 2491.32,3569.29 2491.32,3545.22 2492.58,3543.96 2492.58,3542.97 2501.75,3533.8 2501.75,3508.25 v1(2510,3500) ; D3.K v1(3160,3230)
  Bottom Layer w25: v1(1949.69,2880.31) 2200,3130.63 2200,3316.72 2153.36,3363.36 2126.64,3363.36 v1(2080,3410) ; v1(2510,3500) 2508.03,3498.03 2487.32,3498.03 2460.36,3525 2400,3525 2321.84,3446.84 2321.84,3213.16 2460,3075 3005,3075 v1(3160,3230) 3195,3195 3195,2810 3240,2765 3600,2765 3795,2960
pads on no net: M1.1 M2.1 M3.1 M4. S1.1 U1.9 U1.10 U1.11 U3.9 U3.10 U3.11
copper on no net: | length 9055.5
  Top Layer w10: 3180,2750 3185,2750 ; 1135,2800 ccw(c1227.5,2797.5) 1225,2705 4375,2705 ccw(c4367.5,2792.5) 4455,2800 4455,3900 ccw(c4372.5,3902.5) 4375,3985 1225,3985 ccw(c1222.5,3897.5) 1135,3900 1135,2800

## Other copper
Multi-Layer:
  lines w10: 4700,3985 4710,3975

## Silkscreen, mask and mechanical layers (free items; w line width, h text height)
Top Overlay:
  text "On" at 3450.91,3880.91 h29.53
  text "Off" at 3450.91,3485.91 h29.53

## Text inside footprints (layer, text, board x,y; h text height)
M-1: Top Overlay "-" at 1208,3490 h30 r90; Bottom Overlay "+" at 1394.24,3117.89 h20 r90; Bottom Overlay "-" at 1208,3510 h30 r90
M-2: Top Overlay "-" at 4223,3490 h30 r90; Bottom Overlay "+" at 4409.24,3117.89 h20 r90; Bottom Overlay "-" at 4223,3510 h30 r90